# EAGLE board SonicScrewdriver-R3 (EAGLE 6.5.0)
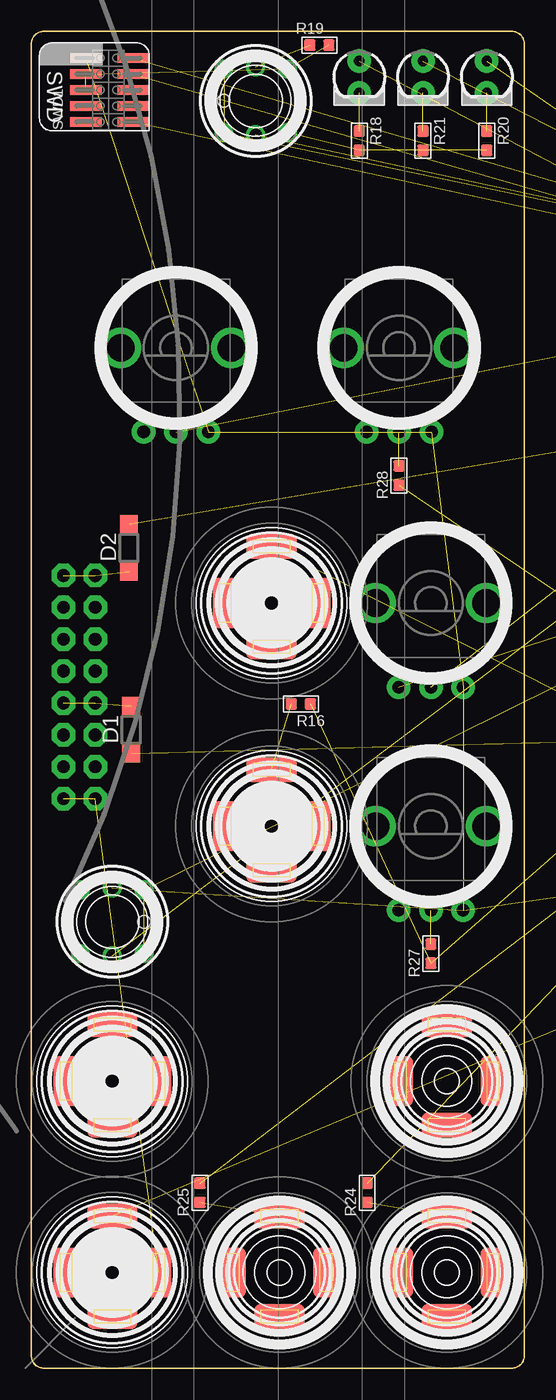
[diagram p0: board, top side]
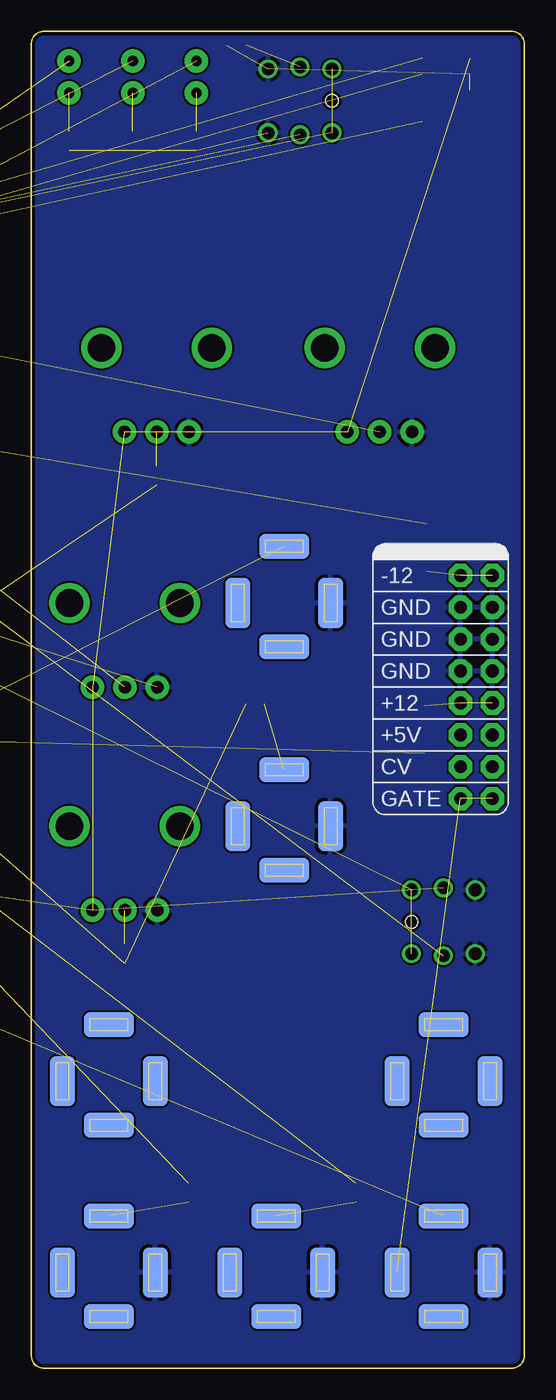
[diagram p1: board, bottom side, seen from below]

Size 39.3 x 106.5 mm. Coordinates in mm from the lower left corner, seen from the top.
Copper layers (1*16): Top 0.035mm / dielectric 1.5mm / Bottom 0.035mm
Design rules "ITEADstudio_DRC": minimum track width 6mil, minimum drill 12mil, track to track 6mil, track to pad 6mil, pad to pad 6mil, via to via 6mil, smd to smd 0mil, copper to edge 10mil, drill to drill 10mil, minimum pad ring 10mil, minimum via ring 6mil, stop-mask expansion 2mil, vias tented up to drill 100mil, thermal gap 10mil

## Footprints (pad centres in the part's own frame; a part is rotated, then mirrored left to right if it is on the bottom)
C0603 = smd 0.889 x 0.889: 1 -0.762,0; 2 0.762,0
AVX-A = smd 1.27 x 1.27: + -1.27,0; - 1.27,0
SOD123 = smd 1.4 x 1.4: A 1.9,0; C -1.9,0
SOT23 = smd 1 x 1.4: 1 -0.95,-1.1; 2 0.95,-1.1; 3 0,1.1
3.5MM-JACK-SWITCH-13MM-INPUT = smd 2 x 4: RING@1 -3.7,0; SWITCH@1 3.7,0 | smd 2 x 4 bottom: RING@2 -3.7,0; SWITCH@2 3.7,0 | smd 4 x 2: SECOND@1 0,-3.5; TIP@1 0,4.5 | smd 4 x 2 bottom: SECOND@2 0,-3.5; TIP@2 0,4.5
SOT223 = smd 1.5 x 2: 1 -2.3,-3.15; 2 0,-3.15; 3 2.3,-3.15 | smd 3.8 x 2: 4 0,3.15
SO14 = smd 0.66 x 2.032: 1 -3.81,-3.073; 2 -2.54,-3.073; 3 -1.27,-3.073; 4 0,-3.073; 5 1.27,-3.073; 6 2.54,-3.073; 7 3.81,-3.073; 8 3.81,3.073; 9 2.54,3.073; 10 1.27,3.073; 11 0,3.073; 12 -1.27,3.073; 13 -2.54,3.073; 14 -3.81,3.073
1X04 = drill 1.016 pad 1.88 square: 1 0,0 | drill 1.016 pad 1.88: 2 2.54,0; 3 5.08,0; 4 7.62,0
LED3MM = drill 0.813 pad 1.88: A -1.27,0; K 1.27,0
SOT23-BEC = smd 1 x 1.4: B -0.95,-1.1; C 0,1.1; E 0.95,-1.1
R0603 = smd 0.889 x 0.889: 1 -0.762,0; 2 0.762,0
OG-POTS_ALPS_POT_VERTICAL = drill 1 pad 1.88: P$1 -2.58,-6.7; P$2 0,-6.7; P$3 2.58,-6.7 | drill 2.2 pad 3.175: P$4 4.4,0; P$5 -4.4,0
M50-3600542 = smd 0.75 x 2.5: 1 -2.54,-1.81; 2 -2.54,2; 3 -1.27,-1.81; 4 -1.27,2; 5 0,-1.81; 6 0,2; 7 1.27,-1.81; 8 1.27,2; 9 2.54,-1.81; 10 2.54,2
QFN50P400X400X100-25N = smd 1.2 x 0.3: 1 -2.2,1.245; 2 -2.2,0.762; 3 -2.2,0.254; 4 -2.2,-0.254; 5 -2.2,-0.762; 6 -2.2,-1.245; 13 2.2,-1.245; 14 2.2,-0.762; 15 2.2,-0.254; 16 2.2,0.254; 17 2.2,0.762; 18 2.2,1.245 | smd 0.3 x 1.2: 7 -1.245,-2.2; 8 -0.762,-2.2; 9 -0.254,-2.2; 10 0.254,-2.2; 11 0.762,-2.2; 12 1.245,-2.2; 19 1.245,2.2; 20 0.762,2.2; 21 0.254,2.2; 22 -0.254,2.2 | smd 0.305 x 1.2: 23 -0.762,2.2; 24 -1.245,2.2 | smd 2.032 x 2.032: 25 0,0
SOT95P237X112-3N = smd 1.321 x 0.559: 1 -1.016,0.94; 2 -1.016,-0.94; 3 1.016,0
POWER_16 = drill 1.016 pad 1.88 octagon: 1 -6.35,-1.27; 2 -6.35,1.27; 3 -3.81,-1.27; 4 -3.81,1.27; 5 -1.27,-1.27; 6 -1.27,1.27; 7 1.27,-1.27; 8 1.27,1.27; 9 3.81,-1.27; 10 3.81,1.27; 11 6.35,-1.27; 12 6.35,1.27; 13 8.89,-1.27; 14 8.89,1.27; 15 11.43,-1.27; 16 11.43,1.27
PB6149L = drill 1: 1 2.54,2.54; 2 2.54,-2.54; 3 -2.54,2.54; 4 -2.54,-2.54; LEDNEG 0,-2.7; LEDPOS 0,2.7 | hole 1: 2.54,0
FIDUCIAL_1MM = smd 1 x 1: 1 0,0
3.5MM-JACK-SWITCH-13MM-OUTPUT = smd 2 x 4: RING@1 -3.7,0; SWITCH@1 3.7,0 | smd 2 x 4 bottom: RING@2 -3.7,0; SWITCH@2 3.7,0 | smd 4 x 2: SECOND@1 0,-3.5; TIP@1 0,4.5 | smd 4 x 2 bottom: SECOND@2 0,-3.5; TIP@2 0,4.5
SOIC8-N_MC = smd 1.981 x 0.559: 1 -2.362,1.905; 2 -2.362,0.635; 3 -2.362,-0.635; 4 -2.362,-1.905; 5 2.362,-1.905; 6 2.362,-0.635; 7 2.362,0.635; 8 2.362,1.905

## Placement (x,y rotation side)
C1  3.3n  [C0603]  68.33,46.5 270 top  (outside the outline)
C2  3.3n  [C0603]  55.33,46 270 top  (outside the outline)
C3  3.3n  [C0603]  66.33,53.5 90 top  (outside the outline)
C4  10uF  [AVX-A]  55.23,75.5 0 top  (outside the outline)
C5  1uF  [C0603]  53.83,65 0 top  (outside the outline)
C8  100nF  [C0603]  68.33,92.5 270 top  (outside the outline)
C9  1uF  [C0603]  59.83,40 180 top  (outside the outline)
C10  100nF  [C0603]  64.83,40 180 top  (outside the outline)
C11  100Nf  [C0603]  62.83,99 180 top  (outside the outline)
C12  10uF  [AVX-A]  70.83,93 90 top  (outside the outline)
C13  10Uf  [AVX-A]  62.83,101.5 0 top  (outside the outline)
C15  3.3n  [C0603]  53.33,53 90 top  (outside the outline)
C18  100nF  [C0603]  55.33,49.5 90 top  (outside the outline)
C19  100nF  [C0603]  66.33,50 270 top  (outside the outline)
D1  1N5819HW  [SOD123]  7.96,50.85 90 top
D2  1N5819HW  [SOD123]  7.78,65.35 90 top
D3  BAS70-04  [SOT23]  66.83,63 90 top  (outside the outline)
D4  BAS70-04  [SOT23]  66.83,58 90 top  (outside the outline)
GATE  Gate  [3.5MM-JACK-SWITCH-13MM-INPUT]  6.45,7.62 0 top
GATE1  Gate  [3.5MM-JACK-SWITCH-13MM-INPUT]  6.45,22.86 0 top
IC1  LD1117AS33TR  [SOT223]  63.33,93.5 180 top  (outside the outline)
IC2  MCP6004  [SO14]  60.68,49.6 270 top  (outside the outline)
IN1  In 2  [3.5MM-JACK-SWITCH-13MM-INPUT]  19.15,43.18 0 top
IN2  In 1  [3.5MM-JACK-SWITCH-13MM-INPUT]  19.15,60.96 0 top
JP1  [1X04]  86.83,98 270 top  (outside the outline)
LED1  [LED3MM]  31.21,102.87 270 top
LED2  [LED3MM]  36.3,102.87 270 top
LED3  [LED3MM]  26.13,102.87 270 top
Q2  MMBT3904  [SOT23-BEC]  62.33,36 180 top  (outside the outline)
R1  100k  [R0603]  64.83,42 0 top  (outside the outline)
R2  33k  [R0603]  66.33,46.5 90 top  (outside the outline)
R3  100k  [R0603]  59.83,42 180 top  (outside the outline)
R4  100k  [R0603]  70.33,52 90 top  (outside the outline)
R5  100k  [R0603]  53.33,46 90 top  (outside the outline)
R6  100k  [R0603]  51.83,48.5 180 top  (outside the outline)
R7  33k  [R0603]  74.83,69.5 90 top  (outside the outline)
R8  100k  [R0603]  68.33,53.5 270 top  (outside the outline)
R9  33k  [R0603]  72.83,69.5 90 top  (outside the outline)
R12  33k  [R0603]  55.33,53 270 top  (outside the outline)
R13  A  [OG-POTS_ALPS_POT_VERTICAL]  11.53,81.28 0 top
R14  D  [OG-POTS_ALPS_POT_VERTICAL]  31.85,43.18 0 top
R15  100k  [R0603]  51.88,50.5 180 top  (outside the outline)
R16  100k  [R0603]  21.48,52.91 180 top
R17  B  [OG-POTS_ALPS_POT_VERTICAL]  29.31,81.28 0 top
R18  2k  [R0603]  26.13,97.79 270 top
R19  56  [R0603]  22.96,105.41 0 top
R20  2k  [R0603]  36.3,97.79 270 top
R21  2k  [R0603]  31.21,97.79 270 top
R22  56  [R0603]  62.83,76.1 90 top  (outside the outline)
R23  10k  [R0603]  70.83,69.5 90 top  (outside the outline)
R24  51  [R0603]  26.77,13.97 90 top
R25  51  [R0603]  13.44,13.97 90 top
R26  100k  [R0603]  57.83,61 90 top  (outside the outline)
R27  100k  [R0603]  31.85,33.02 90 top
R28  100k  [R0603]  29.31,71.12 90 top
R60  10k  [R0603]  65.78,76 270 top  (outside the outline)
R67  100k  [R0603]  67.08,37.9 180 top  (outside the outline)
R90  C  [OG-POTS_ALPS_POT_VERTICAL]  31.85,60.96 0 top
SWD1  CORTEX_SWD  [M50-3600542]  6.15,101.83 270 top
U1  MKL02Z32VFK4  [QFN50P400X400X100-25N]  67.68,85.09 270 top  (outside the outline)
U2  LM4040DIM3-5.0  [SOT95P237X112-3N]  54.33,61 0 top  (outside the outline)
U$1  POWER  [POWER_16]  3.82,56.8 270 bottom
U$2  EURORACK_PCB8HP  [EURORACK8HPPCB]  -0.5,0 0 top
U$3  SWITCH_W_LED_PB6149L-X-102WHITE  [PB6149L]  6.45,35.56 0 top
U$4  FIDUCIAL  [FIDUCIAL_1MM]  -33.81,93.78 0 top  (outside the outline)
U$5  FIDUCIAL  [FIDUCIAL_1MM]  -34.71,90.76 0 top  (outside the outline)
U$6  SWITCH_W_LED_PB6149L-X-102WHITE  [PB6149L]  17.88,100.97 180 top
U$7  Out 2  [3.5MM-JACK-SWITCH-13MM-OUTPUT]  33.12,7.62 0 top
U$8  Out 1  [3.5MM-JACK-SWITCH-13MM-OUTPUT]  19.78,7.62 0 top
U$9  FIDUCIAL  [FIDUCIAL_1MM]  -32,92.5 0 top  (outside the outline)
U$10  MCP4822-E/SN  [SOIC8-N_MC]  70.78,76.6 270 top  (outside the outline)
U$11  FIDUCIAL  [FIDUCIAL_1MM]  -32.44,96.59 0 top  (outside the outline)
U$12  Out 1  [3.5MM-JACK-SWITCH-13MM-OUTPUT]  33.12,22.86 0 top

## Library data of the parts
C1-C5 C8-C13 C15 C18 C19 R1-R9 R12 R15 R16 R18-R28 R60 R67 = OPL
D1-D4 = diode
GATE GATE1 IN1 IN2 R13 R14 R17 R90 U$2 U$7 U$8 U$12 = EurorackModularParts
IC1 = ld-components
IC2 = gm-ics
JP1 = SparkFun-Connectors
LED1-LED3 = SparkFun-LED
Q2 = transistor
SWD1 = carrilib with jtags
U1 = FarnellThings; MPN: MKL02Z32VFK4; OC_FARNELL: 2321481; OC_NEWARK: 61W9887; PACKAGE: QFN-24; SUPPLIER: FREESCALE SEMICONDUCTOR
U2 = FarnellThings; MPN: LM4040DIM3-5.0; OC_FARNELL: 9778330; OC_NEWARK: 97K3489; PACKAGE: SOT-23-3; SUPPLIER: TEXAS INSTRUMENTS
U$1 = eurorack
U$3 U$6 = zephod-components
U$4 U$5 U$9 U$11 = adafruit
U$10 = FarnellThings; DESCRIPTION: 12 Bit DAC; MPN: MCP4822-E/SN; OC_FARNELL: 1439414; OC_NEWARK: 31K2975; PACKAGE: SOIC-8; SUPPLIER: Microchip

## Nets
3.3V: C8.2 C9.2 C10.2 C12.+ D3.2 D4.2 IC1.2 IC1.4 JP1.4 R13.P$3 R14.P$3 R17.P$3 R23.2 R60.2 R90.P$3 SWD1.1 U1.3 U$3.LEDPOS U$10.1
ADC_1: C15.2 D3.3 IC2.1 R12.1 U1.15
ADC_2: C1.2 D4.3 IC2.8 R2.1 U1.16
DACCS: U1.7 U$10.2
DACSCK: U1.12 U$10.3
DACSDI: U1.11 U$10.4
GATE: Q2.C R60.1 U1.8
GND: C4.+ C5.1 C8.1 C9.1 C10.1 C11.1 C12.- C13.- C18.1 C19.1 D3.1 D4.1 GATE.RING@1 GATE.RING@2 IC1.1 IC2.3 IC2.5 IC2.10 IC2.12 IN1.RING@1 IN1.RING@2 IN2.RING@1 IN2.RING@2 JP1.1 Q2.E R13.P$1 R14.P$1 R17.P$1 R18.2 R19.2 R20.2 R21.2 R90.P$1 SWD1.3 SWD1.5 U1.4 U1.25 U2.1 U$1.3 U$1.4 U$1.5 U$1.6 U$1.7 U$1.8 U$3.3 U$3.4 U$6.3 U$6.4 U$7.RING@1 U$7.RING@2 U$8.RING@1 U$8.RING@2 U$10.5 U$10.7
KNOB_A: R90.P$2 U1.19
KNOB_B: R13.P$2 U1.9
KNOB_C: R14.P$2 R27.2
KNOB_D: R17.P$2 R28.2
LED1: U1.1 U$6.LEDPOS
LED2: LED1.A U1.20
LED3: LED2.A U1.14
LED4: LED3.A U1.13
N$1: JP1.3 U1.5
N$2: JP1.2 U1.6
N$3: IN1.TIP@1 IN1.TIP@2 R16.2
N$4: C15.1 IC2.2 R12.2 R15.1 R16.1 R27.1
N$5: SWD1.4 U1.22
N$6: IN2.TIP@1 IN2.TIP@2 R1.2
N$7: SWD1.2 U1.24
N$8: C1.1 IC2.9 R1.1 R2.2 R3.1 R28.1
N$9: C2.1 IC2.6 R5.2 R6.1 R9.1
N$10: C3.1 IC2.13 R4.2 R7.1 R8.2
N$11: R7.2 U$10.8
N$12: R9.2 U$10.6
N$13: D1.A U$1.9 U$1.10
N$14: R19.1 U$6.LEDNEG
N$15: LED3.K R18.1
N$16: LED2.K R20.1
N$17: LED1.K R21.1
N$18: C3.2 IC2.14 R8.1 R24.2
N$19: R22.1 U$3.LEDNEG
N$20: R25.1 U$8.TIP@1 U$8.TIP@2
N$21: R24.1 U$7.TIP@1 U$7.TIP@2
N$24: C2.2 IC2.7 R5.1 R25.2
N$43: GATE.TIP@1 GATE.TIP@2 R67.1
N$64: D2.C U$1.1 U$1.2
N$66: Q2.B R67.2
PTA1: SWD1.10 U1.23
RACK_GATE: GATE.SWITCH@1 GATE.SWITCH@2 U$1.15 U$1.16
REF_-5V: C5.2 R3.2 R4.1 R6.2 R15.2 R26.2 U2.2
SW1: U1.2 U$6.1 U$6.2
SW2: R23.1 U1.17 U$3.1 U$3.2
SW2LED: R22.2 U1.18
VEE: C4.- C19.2 D2.A IC2.11 R26.1
VIN: C11.2 C13.+ C18.2 D1.C IC1.3 IC2.4

## Tracks (layer width: path | path; a pad name or v marks a point on that pad's centre or on a via)
3.3V  (18 unrouted)
ADC_1  (4 unrouted)
ADC_2  (4 unrouted)
DACCS  (1 unrouted)
DACSCK  (1 unrouted)
DACSDI  (1 unrouted)
GATE  (2 unrouted)
GND  (35 unrouted)
  pour Bottom: -22.27,104.7 -21.57,-2 41.65,-2 41.65,107 -21.67,107
KNOB_A  (1 unrouted)
KNOB_B  (1 unrouted)
KNOB_C  (1 unrouted)
KNOB_D  (1 unrouted)
LED1  (1 unrouted)
LED2  (1 unrouted)
LED3  (1 unrouted)
LED4  (1 unrouted)
N$1  (1 unrouted)
N$2  (1 unrouted)
N$3  (2 unrouted)
N$4  (5 unrouted)
N$5  (1 unrouted)
N$6  (2 unrouted)
N$7  (1 unrouted)
N$8  (5 unrouted)
N$9  (4 unrouted)
N$10  (4 unrouted)
N$11  (1 unrouted)
N$12  (1 unrouted)
N$13  (2 unrouted)
N$14  (1 unrouted)
N$15  (1 unrouted)
N$16  (1 unrouted)
N$17  (1 unrouted)
N$18  (3 unrouted)
N$19  (1 unrouted)
N$20  (2 unrouted)
N$21  (2 unrouted)
N$24  (3 unrouted)
N$43  (2 unrouted)
N$64  (2 unrouted)
N$66  (1 unrouted)
PTA1  (1 unrouted)
RACK_GATE  (3 unrouted)
REF_-5V  (6 unrouted)
SW1  (2 unrouted)
SW2  (3 unrouted)
SW2LED  (1 unrouted)
VEE  (4 unrouted)
VIN  (5 unrouted)